# Altium PCB BOARD_34.PcbDoc
Units mm, origin at the board's own origin, x right, y up, seen from the top; angles counter-clockwise.
Board outline 34 x 34 mm, 4 copper layers (Top Layer 1, Top Layer, Bottom Layer, Bottom Layer 1), stack 1.57 mm thick; 60 components, 31 nets, 195 pads, 25 vias.
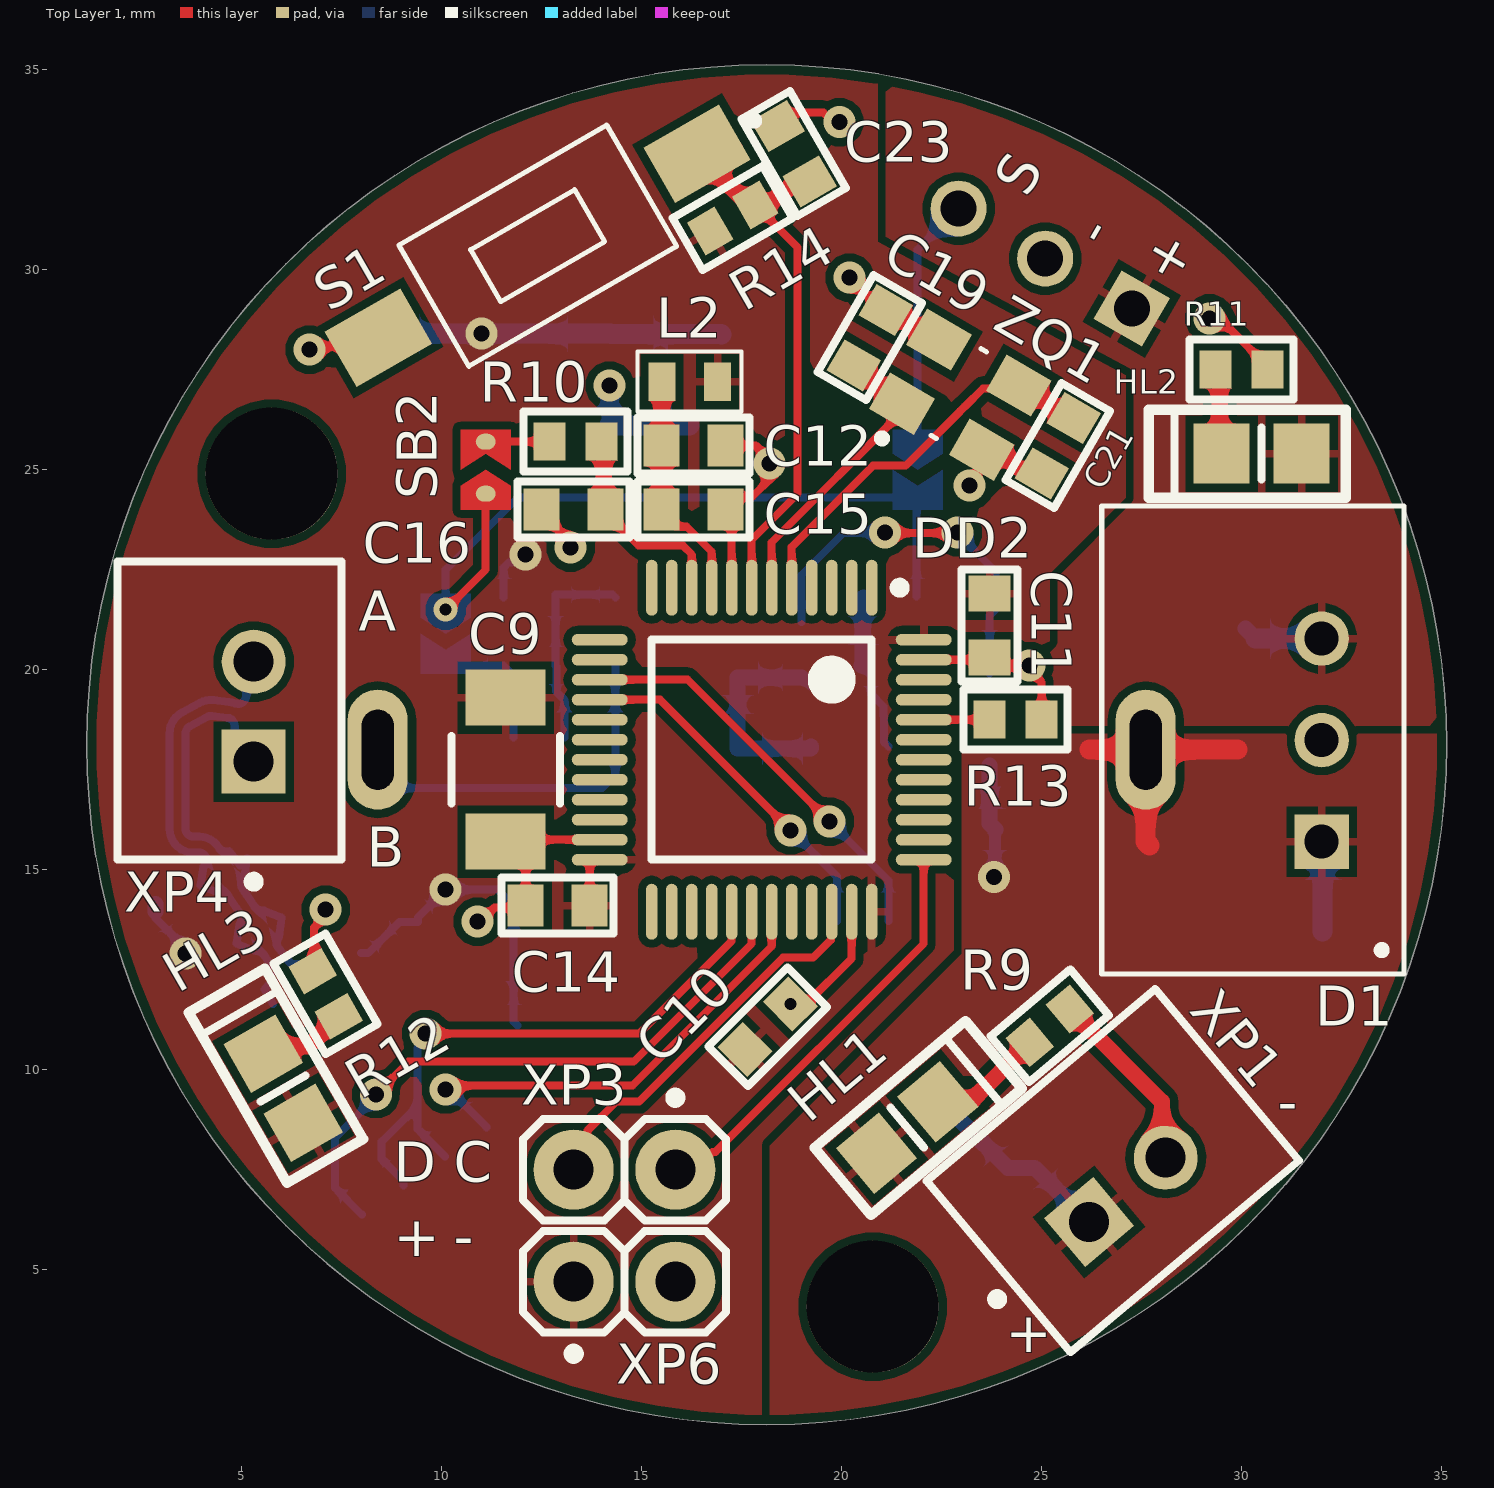
[diagram p0: Top Layer 1 view]
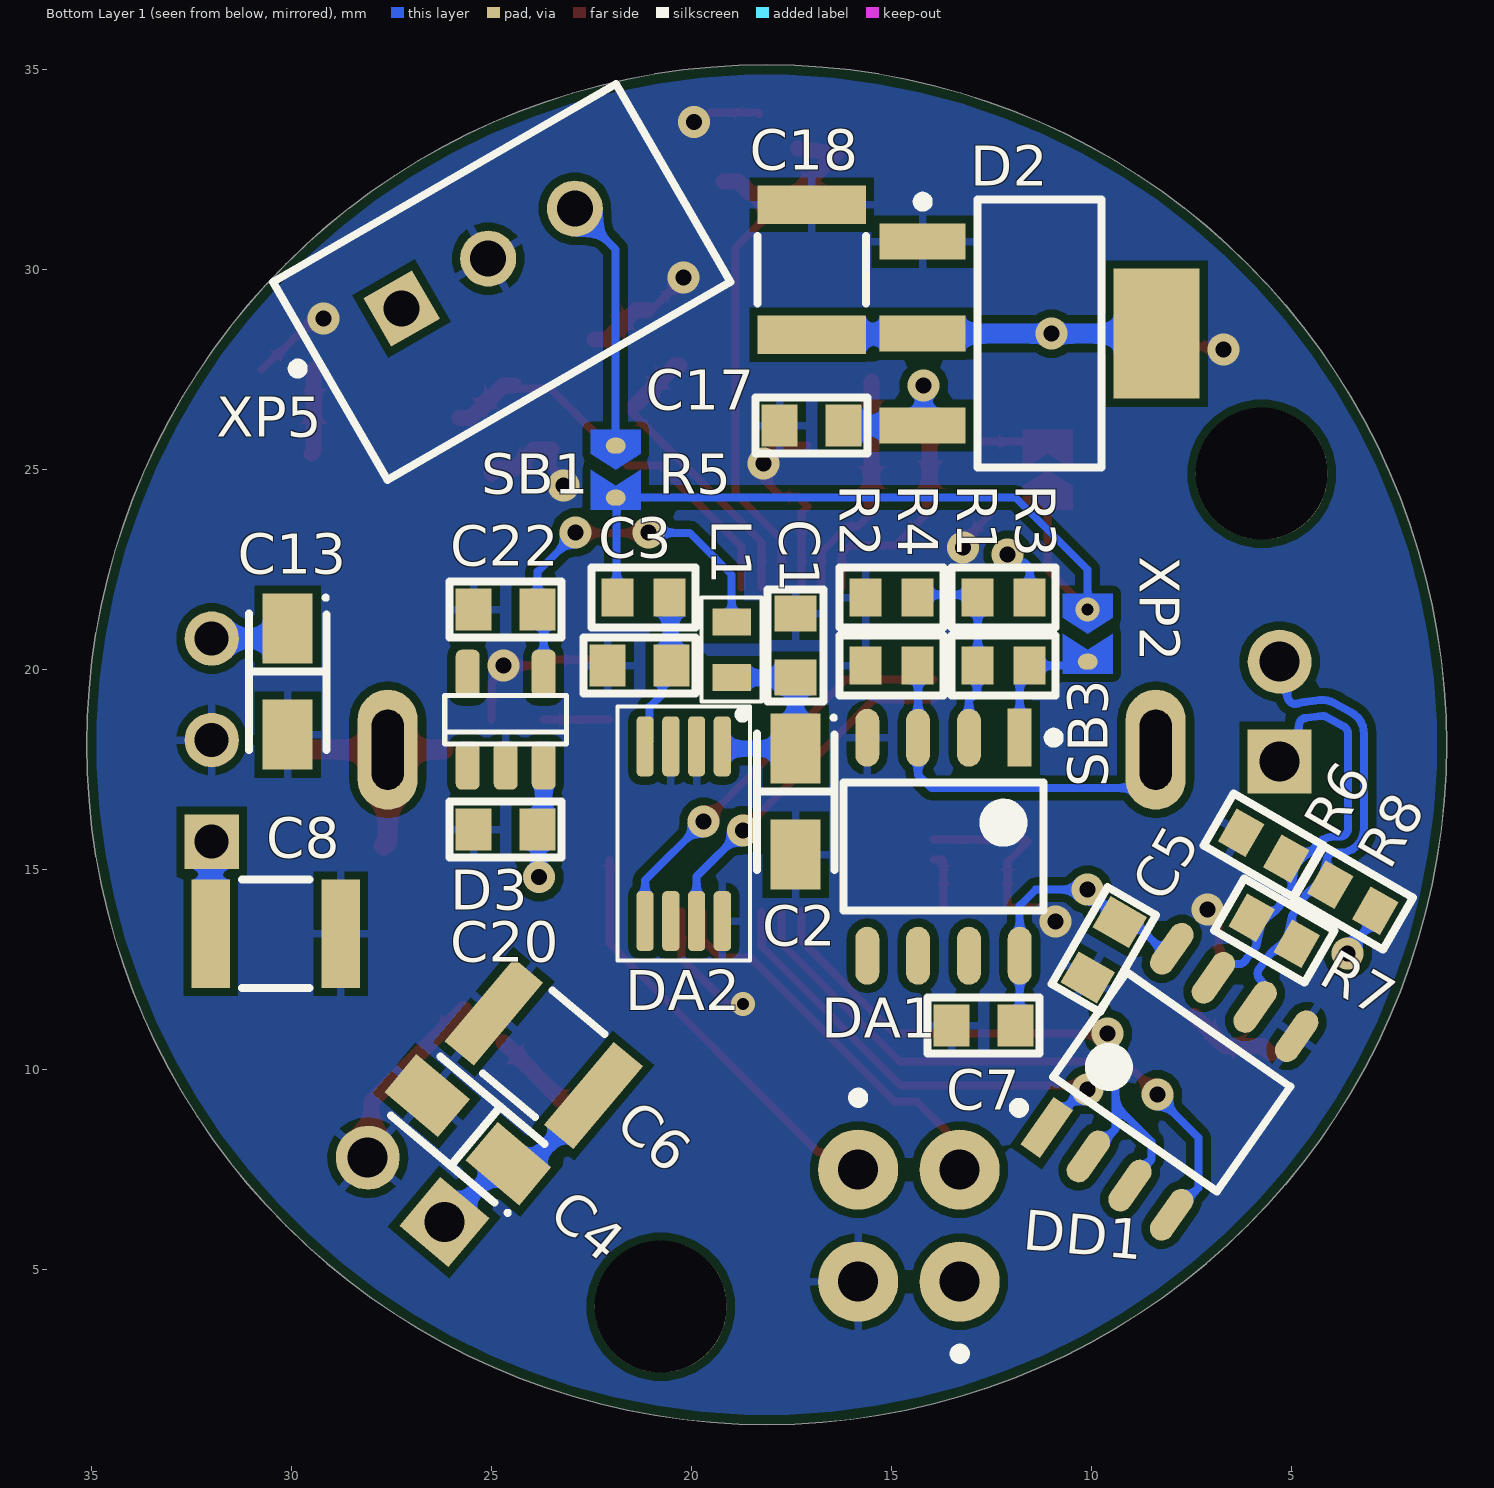
[diagram p1: Bottom Layer 1 view, seen from below]
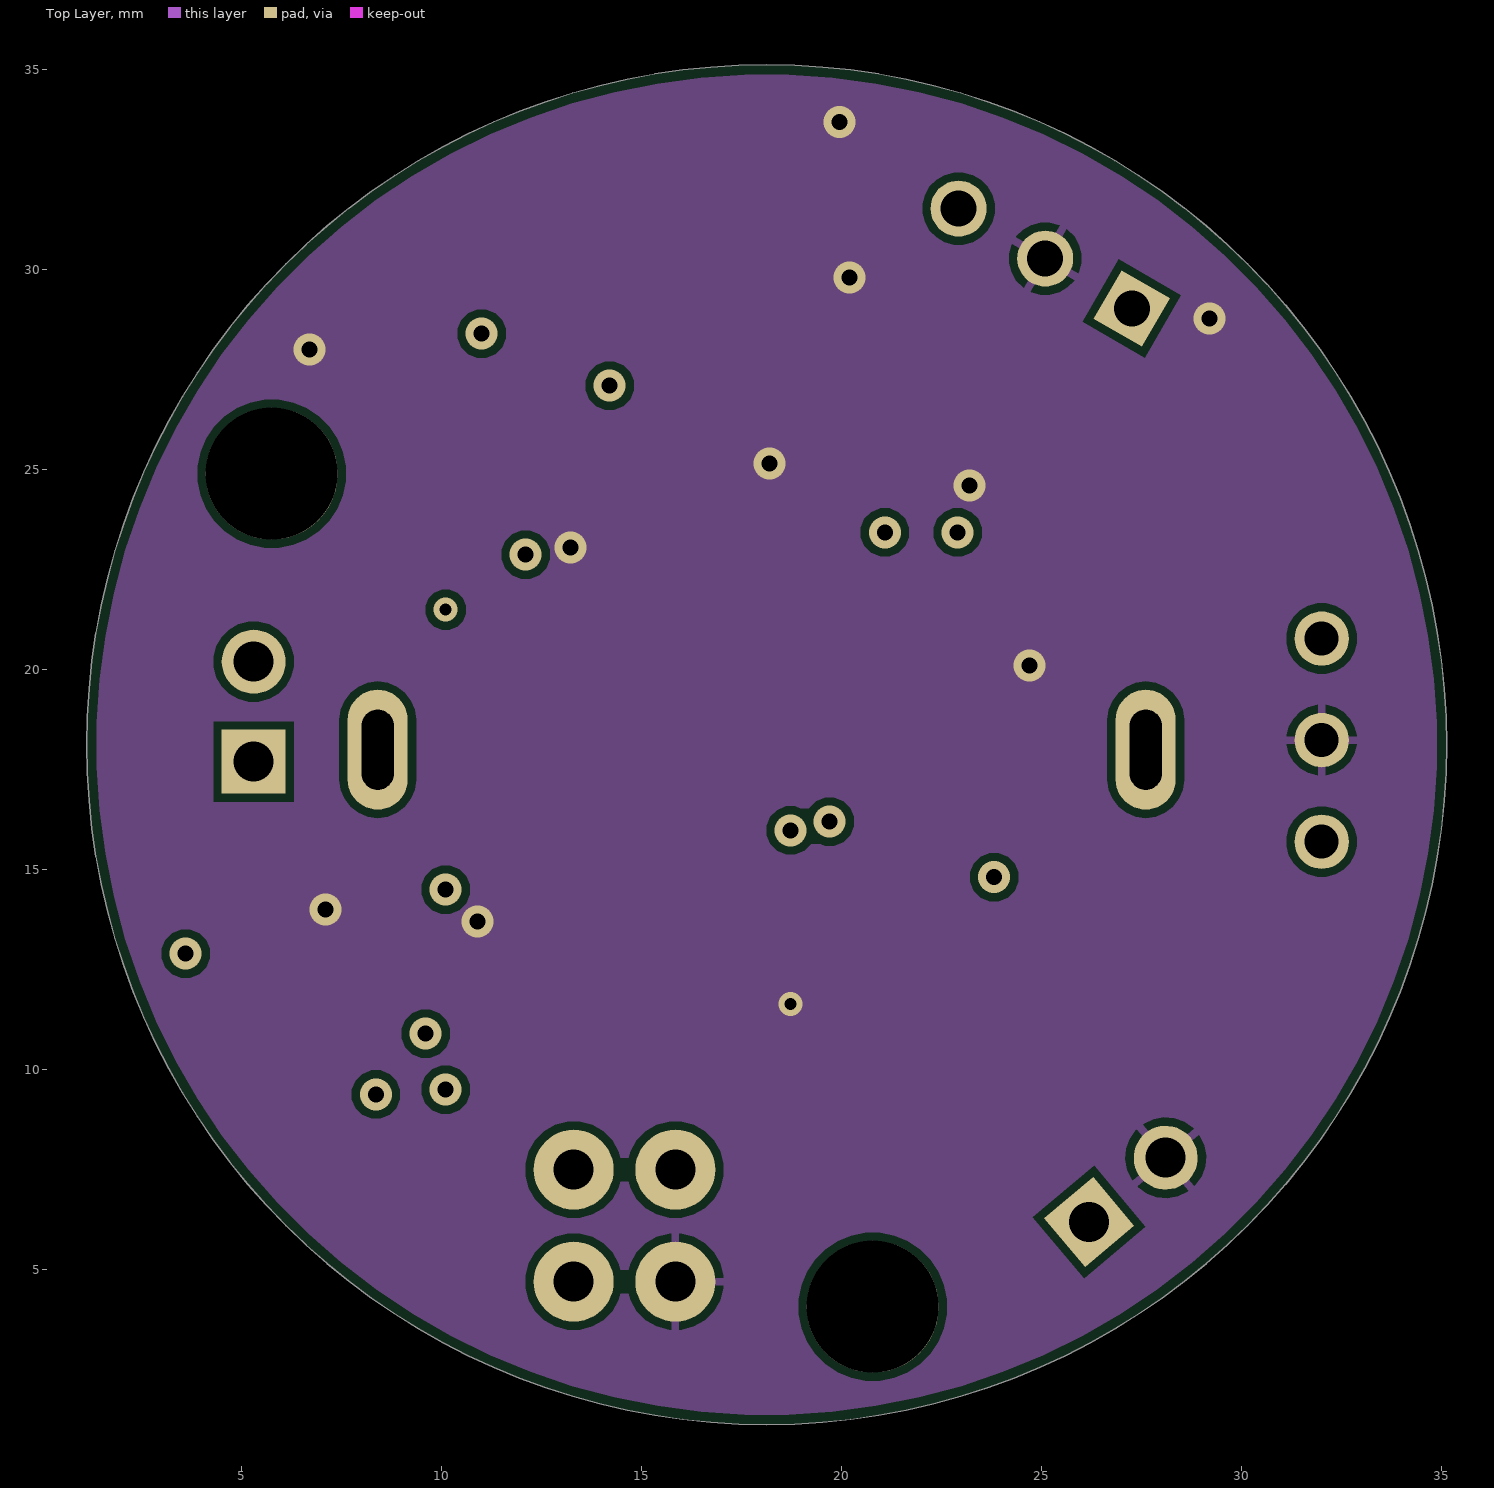
[diagram p2: Top Layer]
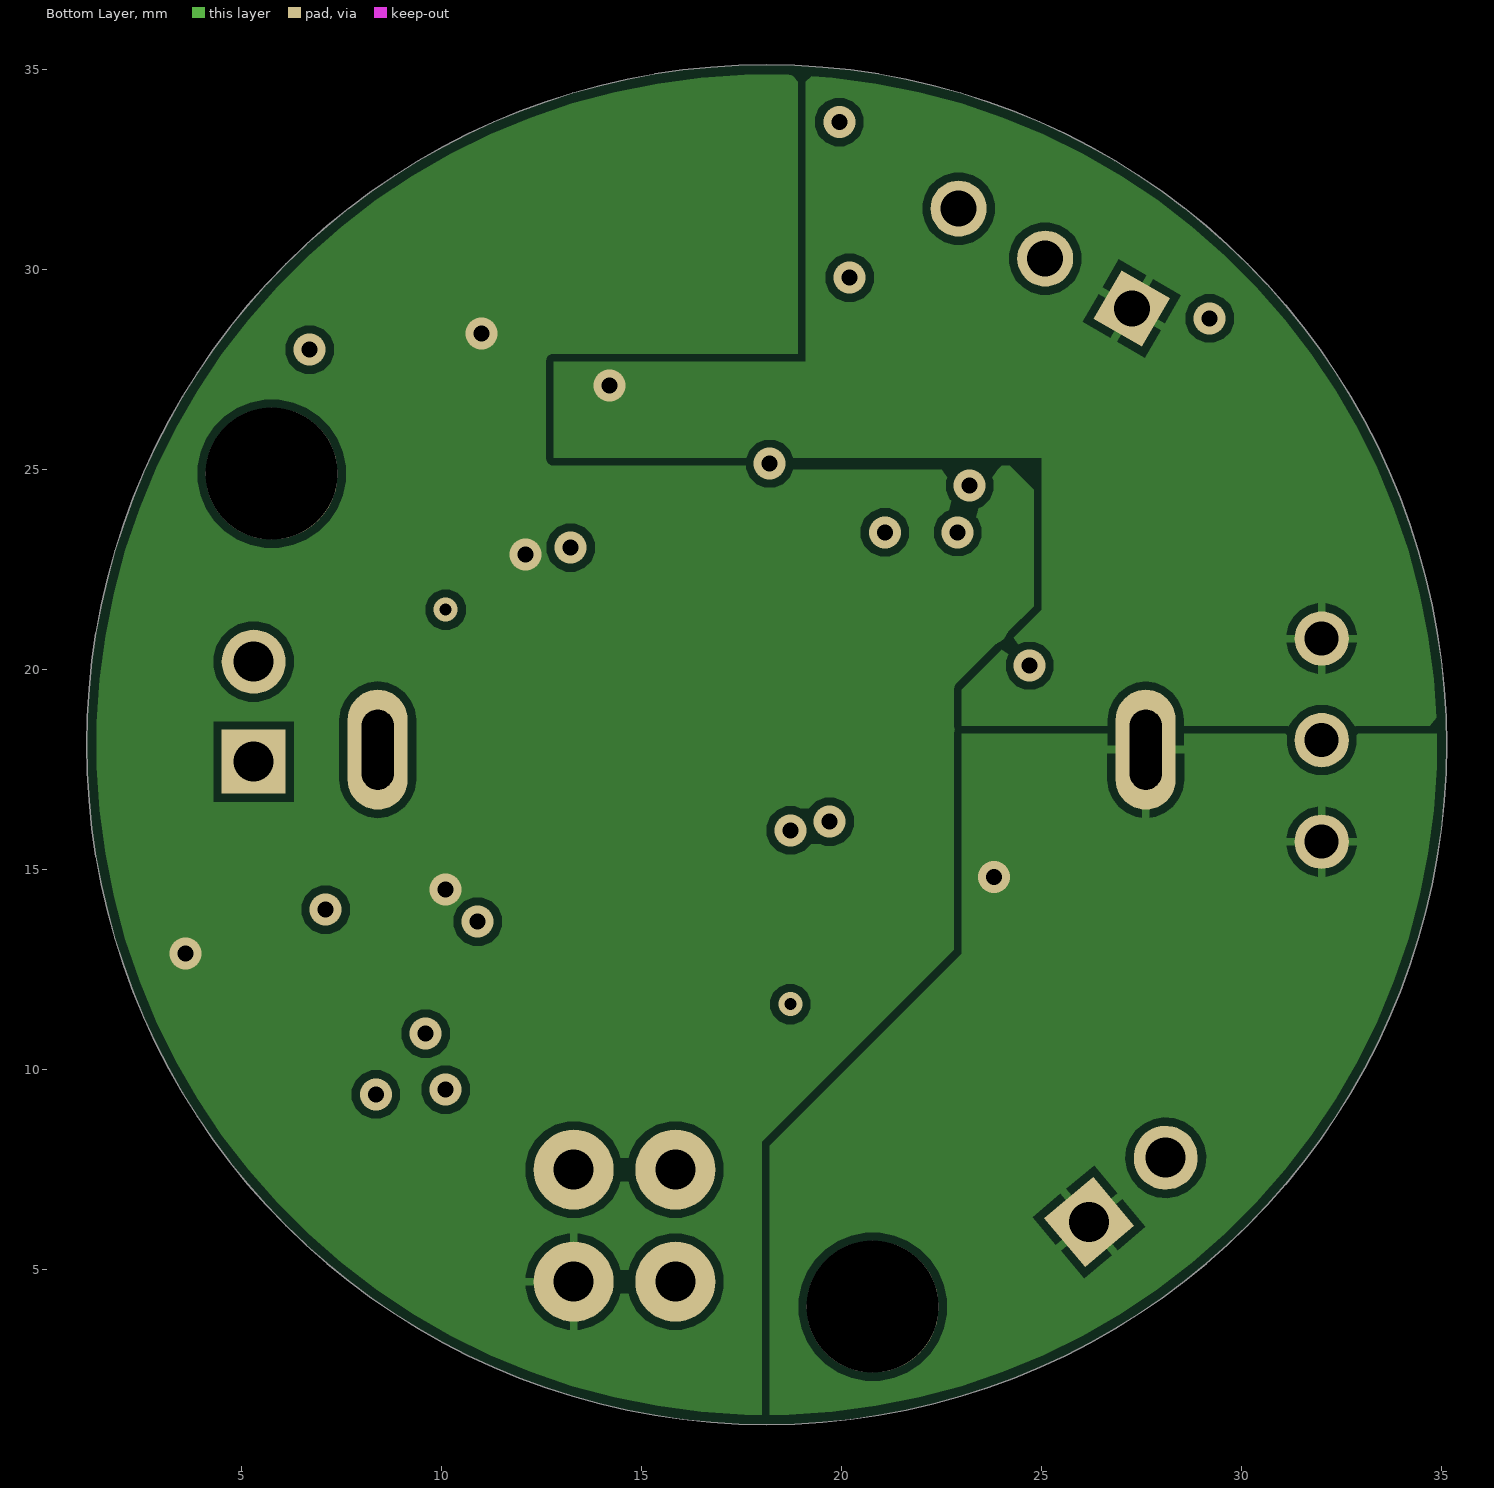
[diagram p3: Bottom Layer]

## Layer stack, top to bottom
Top Solder: solder mask 0.0102, Solder Resist, Dk 3.5
Top Layer 1: signal copper 0.035
Dielectric 2: prepreg 0.115, FR4 PR, Dk 4.2
Top Layer: signal copper 0.035
Dielectric 1: dielectric 1.2, FR-4, Dk 4.8
Bottom Layer: signal copper 0.035
Dielectric 3: prepreg 0.115, FR4 PR, Dk 4.2
Bottom Layer 1: signal copper 0.035
Bottom Solder: solder mask 0.0102, Solder Resist, Dk 3.5

## Board outline
18.125,1.125 cw(c18.125,18.125) 1.125,18.125 cw(c18.125,18.125) 18.125,35.125 cw(c18.125,18.125) 35.125,18.125 cw(c18.125,18.125)

## Design rules (kind name [scope] priority, off if disabled: settings)
BoardOutlineClearance "BoardOutlineClearance 1" [All] p1: gap=0.25 ignorepadtopadclearanceinfootprint=FALSE except(0: Arc-SplitContinuation Track-SplitContinuation SMDPad-SplitContinuation THPad-SplitContinuation Via-SplitContinuation Fill-SplitContinuation Poly-SplitContinuation Region-SplitContinuation Text-SplitContinuation) // Milling
BoardOutlineClearance "BoardOutlineClearance 2" [All] p2: gap=0.4 ignorepadtopadclearanceinfootprint=FALSE except(0: Arc-SplitContinuation Track-SplitContinuation SMDPad-SplitContinuation THPad-SplitContinuation Via-SplitContinuation Fill-SplitContinuation Poly-SplitContinuation Region-SplitContinuation Text-SplitContinuation) // V-Cut
Clearance [All] p1: gap=0.2 ignorepadtopadclearanceinfootprint=FALSE
DiffPairsRouting [All] p1: maxlimit=0.254 minlimit=0.2 mostfreqgap=0.2 toplayer_minwidth=0.2 toplayer_maxwidth=0.35 toplayer_prefwidth=0.3 midlayer1_minwidth=0.2 midlayer1_maxwidth=0.35 midlayer1_prefwidth=0.3 midlayer2_minwidth=0.2 midlayer2_maxwidth=0.35 midlayer2_prefwidth=0.3 bottomlayer_minwidth=0.2 bottomlayer_maxwidth=0.35 bottomlayer_prefwidth=0.3 maxuncoupledlength=10
HoleSize [All] p1: absolutevalues=TRUE maxlimit=2.54 minlimit=0.3 maxpercent=80.000 minpercent=20.000
HoleToHoleClearance [All] p1: gap=0.2 allowstackedmicrovias=TRUE
MinimumAnnularRing MinimumAnnularRing_via [IsVia] p1: minimumring=0.15
MinimumAnnularRing [All] p2: minimumring=0.2
MinimumSolderMaskSliver [All] p1: minsoldermaskwidth=0.2
PlaneClearance [All] p1: clearance=0.2
PlaneConnect [All] p1: planeconnectstyle=Relief reliefexpansion=0.5 reliefentries=4 reliefconductorwidth=0.2 reliefairgap=0.3
PolygonConnect [All] p1: thpad.connectstyle=Relief thpad.reliefconductorwidth=0.2 thpad.reliefentries=4 thpad.polygonreliefangle="90 Angle" thpad.airgapwidth=0.2 smdpad.connectstyle=Relief smdpad.reliefconductorwidth=0.2 smdpad.reliefentries=4 smdpad.polygonreliefangle="90 Angle" smdpad.airgapwidth=0.2 via.connectstyle=Direct via.reliefconductorwidth=0.2 via.reliefentries=4 via.polygonreliefangle="90 Angle" via.airgapwidth=0.2
RoutingCorners [All] p1: cornerstyle=45-Degree minsetback=2 maxsetback=2
RoutingVias [All] p1: holewidth=0.3 width=0.6 viastyle="Through Hole" minholewidth=0.3 minwidth=0.6 maxholewidth=0.5 maxwidth=0.8
SilkToSilkClearance [All] p1: silktosilkclearance=0.15
SilkToSolderMaskClearance [IsPad] p1: minsilkscreentomaskgap=0.2 clearancetoexposedcopper=TRUE
SolderMaskExpansion SolderMaskExpansion_1 [IsVia] p1: expansion=0.102 istentingtop=TRUE
SolderMaskExpansion [All] p2: expansion=0.15 istentingtop=FALSE
SupplyNets "Schematic Supply Nets_9" [InNet('5V')] p1: voltage=0.000
SupplyNets "Schematic Supply Nets_8" [InNet('3.3V')] p2: voltage=0.000
SupplyNets "Schematic Supply Nets_7" [InNet('5RV')] p3: voltage=0.000
SupplyNets "Schematic Supply Nets_6" [InNet('GND')] p4: voltage=0.000
SupplyNets "Schematic Supply Nets_5" [InNet('24V')] p5: voltage=0.000
SupplyNets "Schematic Supply Nets_4" [InNet('+3,3В_IN')] p6: voltage=0.000
SupplyNets "Schematic Supply Nets_3" [InNet('+5В_IN')] p7: voltage=0.000
SupplyNets "Schematic Supply Nets_2" [InNet('+5В')] p8: voltage=0.000
SupplyNets "Schematic Supply Nets_1" [InNet('GND')] p9: voltage=0.000
SupplyNets "Schematic Supply Nets" [InNet('+3,3В')] p10: voltage=0.000
Width [All] p1: maxlimit=0.5 minlimit=0.2 preferedwidth=0.2 minimp=50.000000 maximp=50.000000 favimp=50.000000
21 further rules are at their usual default settings.

## Classes and differential pairs
differential pair RS485: +RS485_P -RS485_N

## Components (designator, comment, footprint, x,y, rotation, side; value= is the part's Value field where it differs from the comment)
C1 "Capacitor" 0603C 17.4,20.6 r270 bottom value="0,1 мк"
C2 "Capacitor" TC_A 17.4,16.7 r270 bottom value="10 мк"
C3 "Capacitor" 0603C 21.3,20.1 r180 bottom value="0,1 мк"
C4 "Capacitor" TC_A 25.6,8.5 r40 bottom value="100 мк"
C5 "Capacitor" 0603C 9.7,13 r120 bottom value="0,1 мк"
C6 "Capacitor" 1210C 23.7,10.4 r220 bottom value="10 мк"
C7 "Capacitor" 0603C 12.7,11.1 r180 bottom value="0,1 мк"
C8 "Capacitor" 1210C 30.4,13.4 r0 bottom value="10 мк"
C9 "Capacitor" 1206C 11.6,17.5 r90 top value="4,7 мк"
C10 "Capacitor" 0603C 18.15,11.075 r225 top value="0,1 мк"
C11 "Capacitor" 0603C 23.7,21.1 r90 top value="0,1 мк"
C12 "Capacitor" 0603C 16.3,25.6 r180 top value="1 мк"
C13 "Capacitor" TC_A 30.1,19.7 r270 bottom value="22 мк"
C14 "Capacitor" 0603C 12.9,14.1 r0 top value="0,1 мк"
C15 "Capacitor" 0603C 16.3,24 r180 top value="10 н"
C16 "Capacitor" 0603C 13.3,24 r0 top value="0,1 мк"
C17 "Capacitor" 0603C 17,26.1 r180 bottom value="0,1 мк"
C18 "Capacitor" 1210C 17,30 r270 bottom value="10 мк"
C19 "Capacitor" 0603C 20.7,28.3 r60 top value="22 п"
C20 "Capacitor" 0603C 24.65,16 r0 bottom value="0,1 мк"
C21 "Capacitor" 0603C 25.4,25.6 r60 top value="22 п"
C22 "Capacitor" 0603C 24.65,21.5 r180 bottom value="0,1 мк"
C23 "Capacitor" 0603C 18.8,32.9 r120 top value="0,1 мк"
D1 "TSR 1-2450" SIP3 30.25,18.24 r90 top
D2 "LD1117S33CTR" SOT223 11.3,28.4 r180 bottom
D3 "ADR02BUJZ-REEL7" SOT23-5 24.65,18.75 r180 bottom
DA1 "AD8602ARZ-REEL7" SOIC-8 13.705,15.575 r270 bottom
DA2 "AD7680ARMZ" MSOP-8 20.2,15.9 r270 bottom
DD1 "MAX485CSA" SOIC-8 8,9.7 r125 bottom
DD2 "STM32F103C8T6" LQFP48 18,18 r270 top
HL1 "LED" 0805D 21.493,8.57 r40 top
HL2 "LED" 0805D 30.6,25.3 r180 top
HL3 "LED" 0805D 6,9.4 r120 top
L1 "Ferrite Bead" 0603L 19,20.5 r270 bottom
L2 "Ferrite Bead" 0603L 16.2,27.2 r180 top
R1 "Resistor" 0603R 12.2,21.8 r180 bottom value="20 к"
R2 "Resistor" 0603R 15,21.8 r180 bottom value="6,2 к"
R3 "Resistor" 0603R 12.2,20.1 r180 bottom value="5,1 к"
R4 "Resistor" 0603R 15,20.1 r0 bottom value=100
R5 "Resistor" 0603R 21.2,21.8 r180 bottom value="10 к"
R6 "Resistor" 0603R 5.7,15.6 r30 bottom value=680
R7 "Resistor" 0603R 5.437,13.475 r30 bottom value=120
R8 "Resistor" 0603R 3.475,14.3 r30 bottom value=680
R9 "Resistor" 0603R 25.2,11.1 r40 top value="1,0 к"
R10 "Resistor" 0603R 13.35,25.7 r0 top value="10 к"
R11 "Resistor" 0603R 30,27.5 r0 top value="1,0 к"
R12 "Resistor" 0603R 7.1,11.9 r120 top value="1,0 к"
R13 "Resistor" 0603R 24.35,18.75 r0 top value="10 к"
R14 "Resistor" 0603R 17.274,31.293 r30 top value="10 к"
S1 "Tact_button" Button_SMD_10mm 12.4,30.6 r210 top
SB1 "SB" 0805SB 22.525,26 r270 bottom
SB2 "SB" 0805SB 11.725,24 r90 top
SB3 "SB" 0805SB 10.725,21.9 r270 bottom
XP1 "CWF-2" CWF-2 28.084,7.819 r220 top
XP2 "WIKA" WIKA_PCB 18,18 r180 bottom
XP3 "PLS-2" PLS2 15.84,7.5 r270 top
XP4 "CWF-2" CWF-2 5.275,20.2 r270 top
XP5 "CWF-3" CWF-3 25.1,30.3 r330 bottom
XP6 "PLS-2" PLS2 13.3,4.7 r90 top
ZQ1 "XTAL_GND" QSMD3.2x2.5 21.508,26.65 r60 top value="8 МГц"

## Footprints (in the part's own frame and the unit in brackets; to place one, negate y for a bottom-side part, rotate by r counter-clockwise, add the part's x,y. Pads: shape width x height; smd on the part's side, far side on the other; paste and mask are expansions set on the pad)
0603C [mm] "Chip Resistor, 2-Leads, Body 1,40x0,80mm, IPC Medium Density"
  rect 0.9x1.05 smd: 1(-0.8,0) 2(0.8,0)
  silkscreen extent -1.4,-0.7 1.4,0.7, body extent -0.85,-0.45 0.85,0.45, height 0.9
0603L [mm] "Chip Inductor, 2-Leads, Body 1,55x0,85mm, IPC Medium Density"
  rect 0.67x0.97 smd: 1(-0.695,0) 2(0.695,0)
  silkscreen extent -1.3,-0.75 1.3,0.75, body extent -0.8,-0.45 0.8,0.45, height 0.45
0603R [mm] "Chip Resistor, 2-Leads, Body 1.60x0.85mm, IPC Medium Density"
  rect 0.8x0.95 smd: 1(-0.65,0) 2(0.65,0)
  silkscreen extent -1.3,-0.75 1.3,0.75, body extent -0.87,-0.47 0.88,0.48, height 0.9
0805D [mm]
  rect 1.4x1.5 smd: 1(-0.9,-0.1) 2(1.1,-0.1)
  silkscreen extent -2,-1.2 2.93,1, body extent -0.98,-0.8 1.17,0.6, height 0.7
0805SB [mm]
  oval 0.4x0.5 smd: 1(0.4,0.625) 2(1.7,0.625)
  Top Layer 1 region: 1,1.25 1.4,0.625 1,0 2,0 2,1.25
  Top Layer 1 region: 0,1.25 0,0 0.6,0 1,0.625 0.6,1.25
  body extent 0.4,0 1.7,1.25, height 0.3
1206C [mm]
  rect 1.4x2 smd paste+0 mask+0: 1(-1.8,0) 2(1.8,0)
  silkscreen extent -0.85,-1.35 0.85,1.35, body extent -1.6,-0.74 1.6,0.86, height 1.59
1210C [mm]
  rect 0.954x2.706 smd paste+0 mask+0: 1(-1.625,0) 2(1.625,0)
  silkscreen extent -0.85,-1.35 0.85,1.35, body extent -1.6,-1.25 1.6,1.25, height 2.7
Button_SMD_10mm [mm]
  rect 2.18x1.6 smd: 1(-4.6,0) 2(4.6,0)
  silkscreen extent -6.35,-1.75 3,1.75, body extent -3.4,-1.75 3.4,1.75, height 5.2
CWF-2 [mm]
  rect 1.6x1.6 hole 1 paste-2539.97 mask+0: 1(2.5,0.025)
  round 1.6 hole 1 paste-2539.97 mask+0: 2(0,0.025)
  silkscreen extent -2.51,-3.38 5.62,2.22, body extent -2.5,-3.53 5,2.23, height 7
CWF-3 [mm]
  rect 1.4x1.4 hole 0.9 paste-2539.97 mask+0: 1(2.5,0.025)
  round 1.4 hole 0.9 paste-2539.97 mask+0: 2(0,0.025) 3(-2.5,0.025)
  silkscreen extent -4.95,-2.16 5.62,3.56, body extent -5,-2.18 5,3.58, height 7
LQFP48 [mm] "TSQFP, 48-Leads, Body 7,00x7,00mm, Pitch 0,50mm, IPC Medium Density"
  oval 1.4x0.29 smd: 1(-4.05,2.75) 2(-4.05,2.25) 3(-4.05,1.75) 4(-4.05,1.25) 5(-4.05,0.75) 6(-4.05,0.25) 7(-4.05,-0.25) 8(-4.05,-0.75) 9(-4.05,-1.25) 10(-4.05,-1.75) 11(-4.05,-2.25) 12(-4.05,-2.75)
  oval 0.29x1.4 smd paste+0 mask+0.09: 13(-2.75,-4.05) 14(-2.25,-4.05) 15(-1.75,-4.05) 16(-1.25,-4.05) 17(-0.75,-4.05) 18(-0.25,-4.05) 19(0.25,-4.05) 20(0.75,-4.05) 21(1.25,-4.05) 22(1.75,-4.05) 23(2.25,-4.05) 24(2.75,-4.05) 37(2.75,4.05) 38(2.25,4.05) 39(1.75,4.05) 40(1.25,4.05) 41(0.75,4.05) 42(0.25,4.05) 43(-0.25,4.05) 44(-0.75,4.05) 45(-1.25,4.05) 46(-1.75,4.05) 47(-2.25,4.05) 48(-2.75,4.05)
  oval 1.4x0.29 smd paste+0 mask+0.09: 25(4.05,-2.75) 26(4.05,-2.25) 27(4.05,-1.75) 28(4.05,-1.25) 29(4.05,-0.75) 30(4.05,-0.25) 31(4.05,0.25) 32(4.05,0.75) 33(4.05,1.25) 34(4.05,1.75) 35(4.05,2.25) 36(4.05,2.75)
  silkscreen extent -4.17,-2.75 2.75,3.58, body extent -4.5,-4.47 4.5,4.52, height 1.48
MSOP-8 [mil]
  rrect50% 59x17 smd: 1(-86,38) 2(-86,12.67) 3(-86,-12.67) 4(-86,-38) 5(86,-38) 6(86,-12.67) 7(86,12.67) 8(86,38)
  silkscreen extent -125,-65 125,65, body extent -96,-59 96,59, height 43
PLS2 [mm]
  round 2 hole 1: 1(0,0) 2(0,-2.54)
  silkscreen extent -1.92,-3.81 1.27,1.27, body extent -1.27,-3.81 1.27,1.27, height 8.44
QSMD3.2x2.5 [mm] "Кварцевый резонатор"
  rect 1.05x1.3 smd: 1(0,0) 2(1.85,-2.3) 3(0,-2.3) 3(1.85,0)
  silkscreen extent -1.1,-1.18 2.18,0.1, body extent -0.32,-2.75 2.18,0.45, height 0.8
SIP3 [mm]
  rect 1.358x1.358 / inner round 1.358 / far side rect 1.358x1.358 hole 0.85: 1(-2.54,-1.75)
  round 1.358 hole 0.85: 2(0,-1.75) 3(2.54,-1.75)
  silkscreen extent -5.85,-3.81 5.85,3.75, body extent -5.85,-3.75 5.85,3.75, height 10.15
SOIC-8 [mm] "for operational amplifier"
  rect 1.45x0.6 smd: 1(-2.725,1.905)
  oval 1.45x0.6 smd: 2(-2.725,0.635) 3(-2.725,-0.635) 4(-2.725,-1.905) 5(2.725,-1.905) 6(2.725,-0.635) 7(2.725,0.635) 8(2.725,1.905)
  silkscreen extent -2.85,-2.5 1.6,2.88, body extent -3,-2.5 3,2.5, height 1.75
SOT23-5 [mm]
  rrect50% 0.6x1.2 smd: 1(-0.95,-1.15) 2(0,-1.15) 3(0.95,-1.15) 4(0.95,1.15) 5(-0.95,1.15)
  silkscreen extent -1.52,-0.61 1.52,0.61, body extent -1.5,-1.25 1.5,1.25, height 1.1
SOT223 [mm] "SOT223, ld1117"
  rect 2.15x0.9 smd: 1(-2.925,2.3) 2(-2.925,0) 3(-2.925,-2.3)
  rect 2.15x3.25 smd: 2(2.925,0)
  silkscreen extent -3.05,-3.35 1.55,3.42, body extent -3.56,-3.3 3.51,3.2, height 1.6
TC_A [mm] "Tantalum capacitor, type A,  1 pin - plus"
  rect 1.75x1.25 smd: 1(-1.325,0) 2(1.325,0)
  silkscreen extent -2.15,-0.97 1.7,1, body extent -1.73,-0.8 1.73,0.8, height 1.64
WIKA_PCB [mm]
  oval 1.5x3 hole 0.8 slot 2 at 90 deg: 1(-9.6,0) 2(9.6,0)
  body extent -9.96,-3.45 9.96,3.45, height 0.01

## Part data
C1 C3 C5 C7 C10 C11 C14 C16 C17 C20 C22 C23: library part Capacitor_0,1u_10_50V_X7R_0603C, "Конденсатор", Capacity (nF)=100, Dielectric=X7R, Tolerance=0,1, Voltage (V)=50, Library Path2=Schematic\Capacitor.SchLib, Part Number=Capacitor_0,1u_10_50V_X7R_0603C
C2: library part Capacitor_10u_10_50V_TC_A, "Танталовый конденсатор", Capacity (uF)=10, Tolerance=0,1, Voltage (V)=50, Part Number=Capacitor_10u_10_50V_TC_A, Type=Tantalum
C4: library part Capacitor_100u_10_50V_TC_A, "Танталовый конденсатор", Capacity (uF)=100, Tolerance=0,1, Voltage (V)=50, Part Number=Capacitor_100u_10_50V_TC_A, Type=Tantalum
C6 C8 C18: library part Capacitor_10u_10_35V_X7R_1210C, "Конденсатор", Capacity (nF)=10000, Dielectric=X7R, Tolerance=0,1, Voltage (V)=35, Library Path2=Schematic\Capacitor.SchLib, Part Number=Capacitor_10u_10_35V_X7R_1210C
C9: library part Capacitor_4,7u_10_50V_X7R_1206C, "Конденсатор", Capacity (nF)=4700, Dielectric=X7R, Tolerance=0,1, Voltage (V)=50, Library Path2=Schematic\Capacitor.SchLib, Part Number=Capacitor_4,7u_10_50V_X7R_1206C
C12: library part Capacitor_1u_10_50V_X7R_0603C, "Конденсатор", Capacity (nF)=1000, Dielectric=X7R, Tolerance=0,1, Voltage (V)=50, Library Path2=Schematic\Capacitor.SchLib, Part Number=Capacitor_1u_10_50V_X7R_0603C
C13: library part Capacitor_22u_10_50V_TC_A, "Танталовый конденсатор", Capacity (uF)=22, Tolerance=0,1, Voltage (V)=50, Part Number=Capacitor_22u_10_50V_TC_A, Type=Tantalum
C15: library part Capacitor_10n_10_50V_X7R_0603C, "Конденсатор", Capacity (nF)=10, Dielectric=X7R, Tolerance=0,1, Voltage (V)=50, Library Path2=Schematic\Capacitor.SchLib, Part Number=Capacitor_10n_10_50V_X7R_0603C
C19 C21: library part Capacitor_22p_5_50V_X7R_0603C, "Конденсатор", Capacity (nF)=0,022, Dielectric=X7R, Tolerance=0,05, Voltage (V)=50, Library Path2=Schematic\Capacitor.SchLib, Part Number=Capacitor_22p_5_50V_X7R_0603C
D1: "DC/DC преобразователь, 5Вт, вход 6.5-36В, выход 5В/ 1А", Part Number="TSR 1-2450"
D2: "Линейный стабилизатор напряжения", Part Number=LD1117S33CTR
D3: "Источник опорного напряжения, 5 В", Part Number=ADR02BUJZ-REEL7
DA1: "2-х канальный прецизионный, широкополосный операционный усилитель с однополярным питанием", Part Number=AD8602ARZ-REEL7
DA2: "16-бит АЦП, SAR, 100Квыборок/с", Part Number=AD7680ARMZ
DD1: "RS-485 приёмопередатчик", Part Number=MAX485CSA
DD2: "Микроконтроллер", Case=корпус, Manufacturer="ST Microelectronics", Value1=MCU, Datasheet=http://www.st.com/content/ccc/resource/technical/document/datasheet/33/d4/6f/1d/df/0b/4c/6d/CD00161566.pdf/files/CD00161566.pdf/jcr:content/translations/en.CD00161566.pdf, Notice="48 пиновая версия STM32F103", Part Number=STM32F103C8T6, Rate=-0,3...4,0В, Shop="магазин с самой дешевой ценой"
HL1: "Светодиод", Color=Red, Part Number=LED
HL2: "Светодиод", Color=Yellow, Part Number=LED
HL3: "Светодиод", Color=Green, Part Number=LED
L1 L2: library part Inductance, "BLM18AG121SZ1D Ferrite Beads Multi-Layer 120Ohm 25% 100MHz 0.8A 0.18Ohm DCR 0603 Automotive T/R Бусина ферритовая чип, габарит 0603, импеданс 120R, максимальный постоянный ток 800MA, активное сопротивление 0R18", Part Number=Inductance
R1: library part Resistor_20k_1_0603, "Резистор номиналом 20 кОм и точностью 1%", Tolerance=1%, Part Number=Resistor_20k_1_0603
R2: library part Resistor_6.2k_1_0603, "Резистор номиналом 6,2 кОм и точностью 1%", Tolerance=1%, Part Number=Resistor_6.2k_1_0603
R3: library part Resistor_5.1k_1_0603, "Резистор номиналом 5,1 кОм и точностью 1%", Tolerance=1%, Part Number=Resistor_5.1k_1_0603
R4: library part Resistor_100_1_0603, "Резистор номиналом 100 Ом и точностью 1%", Tolerance=1%, Part Number=Resistor_100_1_0603
R5 R10 R13 R14: library part Resistor_10k_1_0603, "Резистор номиналом 10 кОм и точностью 1%", Tolerance=1%, Part Number=Resistor_10k_1_0603
R6 R8: library part Resistor_680_1_0603, "Резистор номиналом 680 Ом и точностью 1%", Tolerance=1%, Part Number=Resistor_680_1_0603
R7: library part Resistor_120_1_0603, "Резистор номиналом 120 Ом и точностью 1%", Tolerance=1%, Part Number=Resistor_120_1_0603
R9 R11 R12: library part Resistor_1.0k_1_0603, "Резистор номиналом 1,0 кОм и точностью 1%", Tolerance=1%, Part Number=Resistor_1.0k_1_0603
S1: "Тактовая кнопка", Part Number=Tact_button
SB1 SB2 SB3: "Solder bridge, мост припоя, запаиваемая перемычка, net tie, jumper", Part Number=SB
XP1: library part XT30UPB-F, "30 А (15 продолжительно), прямая мать", Value1=+24V, Value2=GND, Part Number=XT30UPB-F, System=Connector
XP3: "Гребенка 2 пина", Value1=SWCLOCK, Value2=SWDIO, Part Number=PLS-2, System=Connector
XP4: "2-пиновый разъем с ключом", Value1=RS485_B, Value2=RS485_A, Datasheet=https://static.chipdip.ru/lib/413/DOC001413777.pdf, Part Number=CWF-2, System=Connector
XP5: "3-пиновый разъем с ключом", Value1=+5V, Value2=GND, Value3=SIG, Part Number=CWF-3, System=Connector
XP6: "Гребенка 2 пина", Value1=+3.3V, Value2=GND, Part Number=PLS-2, System=Connector
ZQ1: "Кварцевый резонатор с входом земли", Part Number=XTAL_GND
XP2: Part Number=WIKA

## Free pads (board coordinates)
  round 3.3 hole 3.3 unplated: 41(20.775,4.075) 42(5.75,24.9)

## Via types
v1: diameter 0.8, hole 0.4, Top Layer 1 to Bottom Layer 1, tented both sides, 23 vias
v2: diameter 0.6, hole 0.3, Top Layer 1 to Bottom Layer 1, tented both sides, 2 vias

## Nets (pads, with @x,y where several pads share a name; then routed paths per layer and width w, separated by ;. In a path a pad name is that pad's centre, name@x,y a point inside that pad or via, vN(x,y) a via of type N, cw(c..) or ccw(c..) an arc to the next point about the centre after c; other vN are vias at no path point)
0.5-4.5V: SB1.1 XP5.3 | length 6.4
  Bottom Layer 1 w0.2: SB1.1 21.9,30.506 XP5.3
3.3V: C5.2 C7.2 C9.2 C10.2 C11.2 C14.2 C18.2 D2.2 DA1.8 DD1.8 DD2.24 DD2.36 DD2.48 HL3.1 L2.1 R1.2 R8.1 R14.1 XP6.1 | length 21
  Top Layer 1 w0.2: C14.2 13.7,15.208 13.742,15.25 DD2.24
  Bottom Layer 1 w0.2: R8.1@2.845,14.147 2.845,13.789 3.6,13.034 v1(3.6,12.9) ; DD1.8@7.987,12.912 8.162,12.912 8.942,13.693 C5.2 9.41,13.693 9.41,13.81 v1(10.1,14.5) 11.4,14.5 11.8,14.1 DA1.8 11.8,11.2 C7.2 ; R1.2 11.55,22.558 11.677,22.685 11.748,22.685 11.938,22.875 v1(12.1,22.875)
  Bottom Layer 1 w0.4: R8.1@2.845,13.95 R8.1@2.845,14.147
  Bottom Layer 1 w0.5: D2.2@8.375,28.4 v1(11,28.4) 14.225,28.4 14.238,28.387 16.987,28.387 C18.2
4-20uA: DA1.3 R4.1 XP2.2 | length 9.4
  Bottom Layer 1 w0.2: XP2.2 8.4,17.641 9.001,17.041 14.007,17.041 14.34,17.374 R4.1@14.34,20.09
5RV: C22.2 D3.4 L1.1 | length 9.5
  Top Layer 1 w0.2: v1(21.077,23.434) 21.094,23.417 22.883,23.417 v1@22.9,23.4
  Bottom Layer 1 w0.2: L1.1 19,22.372 20.051,23.423 21.067,23.423 v1(21.077,23.434) ; v1@22.9,23.4 23.85,22.45 C22.2 23.7,21.35 D3.4
  other v1: 22.9,23.434
5V: C13.1 C17.2 D1.3 D2.3 HL2.1 XP5.1 | length 5
  Bottom Layer 1 w0.4: D2.3@14.2,26.125 v1(14.2,27.1) ; C13.1 C13.1@30.345,20.78
  Bottom Layer 1 w0.5: D2.3@14.2,26.125 D2.3 C17.2 ; C13.1@30.345,20.78 D1.3
24V: C4.1 C6.2 C8.2 C20.1 D1.1 D3.3 HL1.1 XP1.1 XP2.1 | length 16.3
  Top Layer 1 w0.5: 26.2,18 XP2.1 ; 27.7,15.6 27.6,15.7 XP2.1 ; 29.9,18 XP2.1
  Bottom Layer 1 w0.3: v1@23.831,14.831 C20.1@23.831,15.981
  Bottom Layer 1 w0.4: C6.2@22.555,9.255 22.555,9.147 24.154,7.548 24.685,7.548 24.821,7.548 26.176,6.193 XP1.1 ; D3.3 23.7,16.15 C20.1 C20.1@23.831,15.981 ; v1(23.812,14.813) v1@23.831,14.831 ; C8.2@32,13.425 C8.2@32.025,13.45 ; D1.1 D1.1@32.025,15.675
  Bottom Layer 1 w0.5: C8.2@32.025,13.45 D1.1@32.025,15.675
ADC1_IN: R5.1 SB1.2 SB2.1 SB3.1 | length 19.3
  Top Layer 1 w0.2: v2(10.1,21.5) 11.1,22.5 SB2.1
  Bottom Layer 1 w0.2: v2(10.1,21.5) 10.1,22.5 11.9,24.3 SB1.2 ; R5.1@21.875,21.825 SB1.2@21.875,24.275
BOOT0: DD2.44 R13.1 | length 1.7
  Top Layer 1 w0.2: DD2.44 R13.1
GND: C1.1 C2.2 C3.1 C4.2 C5.1 C6.1 C7.1 C8.1 C9.1 C10.1 C11.1 C12.1 C13.2 C14.1 C15.1 C16.1 C17.1 C18.1 C19.2 C20.2 C21.1 C22.1 C23.2 D1.2 D2.1 D3.2 DA1.4 DA2.2 DA2.3 DA2.8 DD1.5 DD2.8 DD2.23 DD2.35 DD2.47 R2.1 R4.2 R6.2 R9.2 R11.2 R12.2 R13.2 S1.2 XP1.2 XP5.2 XP6.2 ZQ1.3 | length 37.4
  Top Layer 1 w0.2: v1(6.7,28) 6.777,28.077 8.194,28.077 S1.2 ; R12.2 6.812,12.5 6.812,13.55 7.1,13.838 v1(7.1,14) ; v1(10.9,13.7) 10.967,13.7 11.317,14.05 12.1,14.05 C14.1 12.1,15.2 C9.1 11.65,15.75 DD2.23 ; C16.1 12.5,23.925 13.224,23.201 v1(13.224,23.053) ; C12.1 17.85,25.6 18.2,25.25 v1(18.2,25.15) 18.2,24.759 17.766,24.325 17.35,24.325 17.1,24.075 17.25,23.925 DD2.8 ; C23.2@18.3,33.893 18.338,33.93 19.539,33.93 19.778,33.691 v1(19.94,33.691) ; C10.1@18.984,11.549 18.807,11.549 v2(18.716,11.641) 19.107,11.641 20.25,12.783 DD2.35 ; v1(20.2,29.8) 21.007,28.993 C19.2 ; DD2.47 23.65,20.25 C11.1 23.9,20.1 v1(24.7,20.1) 24.7,19.983 25,19.683 R13.2 ; v1(23.2,24.6) 23.315,24.715 23.315,24.877 23.5,25.062 ZQ1.3@23.5,25.5 ; v1(29.2,28.781) 29.315,28.666 29.559,28.666 30.425,27.8 30.45,27.8 R11.2@30.75,27.5
  Top Layer 1 w0.4: C19.2 21.387,28.993 22.128,28.252 ZQ1.3@22.433,28.252 ; ZQ1.3@23.5,25.5 23.954,25.5 24.427,25.027 24.881,25.027 C21.1 ; R9.2 25.698,11.509 28.006,9.2 28.006,7.894 XP1.2
NetC1_2: C1.2 C2.1 DA2.1 L1.2 | length 5.6
  Bottom Layer 1 w0.2: L1.2 L1.2@19.235,19.57
  Bottom Layer 1 w0.4: L1.2 18.998,19.803 17.403,19.803 C1.2 C2.1 19.219,18.025 19.235,18.041 DA2.1
NetC3_2: C3.2 DA2.4 R5.2 | length 4
  Bottom Layer 1 w0.2: C3.2 20.733,19.867 20.733,19.392 21.05,19.075 21.05,18.851 21.054,18.847 21.054,18.195 DA2.4
  Bottom Layer 1 w0.4: C3.2 20.525,20.125 20.525,21.775 R5.2
NetC12_2: C12.2 C15.2 DD2.9 L2.2 | length 5.8
  Top Layer 1 w0.2: C15.2 15.5,23.925 15.85,23.575 16.126,23.575 16.75,22.951 DD2.9
  Top Layer 1 w0.4: C15.2 C12.2 15.503,25.603 15.503,27.198 L2.2
NetC16_2: C16.2 DD2.10 R10.2 | length 5.2
  Top Layer 1 w0.2: C16.2@14.05,24.05 14.05,23.975 14.925,23.1 16.035,23.1 16.25,22.885 DD2.10
  Top Layer 1 w0.4: R10.2 14.05,25.65 C16.2@14.05,24.05
NetDA1_2: DA1.2 R1.1 R2.2 R3.1 | length 5.2
  Bottom Layer 1 w0.2: DA1.2 13.07,19.241 12.868,19.442 12.868,20.082 R3.1 12.85,21.875 14.275,21.875 R2.2
NetHL1_2: HL1.2 R9.1 | length 2.9
  Top Layer 1 w0.4: HL1.2 22.412,9.188 23.208,9.188 R9.1
NetHL2_2: HL2.2 R11.1 | length 2.1
  Top Layer 1 w0.4: R11.1@29.45,27.5 29.45,25.45 HL2.2
NetHL3_2: HL3.2 R12.1 | length 2.3
  Top Layer 1 w0.4: HL3.2 5.724,10.59 6.678,10.59 R12.1
OSCin: C21.2 DD2.5 ZQ1.2 | length 10.1
  Top Layer 1 w0.2: DD2.5 18.75,23.068 20.782,25.1 21.6,25.1 22.954,26.454 22.96,26.464 23.075,26.58 23.08,26.58 23.526,27.026 24.349,27.026 ZQ1.2
  Top Layer 1 w0.4: ZQ1.2 24.717,27.102 25.526,26.293 C21.2
OSCout: C19.1 DD2.6 ZQ1.1 | length 7.4
  Top Layer 1 w0.2: DD2.6 18.25,23.185 21.508,26.443 ZQ1.1
  Top Layer 1 w0.4: C19.1 20.416,27.607 ZQ1.1@21.374,26.65
RESET: C23.1 DD2.7 R14.2 S1.1 | length 14.9
  Top Layer 1 w0.2: DD2.7 17.75,23.251 18.9,24.401 18.9,30.555 R14.2
  Top Layer 1 w0.4: S1.1@17.338,33.028 S1.1 R14.2@17.707,31.576 ; R14.2 18.167,31.618 18.449,31.9 18.533,31.9 18.84,32.207 C23.1
RS485_N: DD1.7 R6.1 R7.2 XP4.1 | length 11
  Bottom Layer 1 w0.2: 4.439,15.535 ccw(c4.612,15.636) 4.665,15.443 4.69,15.45 R6.1@4.962,15.111 ; 4.439,15.535 ccw(c4.093,15.335) 4.438,15.537 ccw(c3.92,15.235) 3.832,15.828 3.824,15.827 cw(c3.794,16.025) 3.594,16.025 3.594,18.406 cw(c3.794,18.406) 3.699,18.582 4.132,18.817 cw(c4.227,18.641) 4.248,18.84 4.642,18.799 cw(c4.621,18.6) 4.692,18.787 ; 4.693,18.787 cw(c4.621,18.6) 4.821,18.6 4.821,18.4 4.926,18.4 XP4.1 ; 5.014,14.541 cw(c5.188,14.64) 5.046,14.781 5.065,14.8 5.108,15.14 R6.1 ; 5.015,14.54 ccw(c5.188,14.64) 5.021,14.53 5.303,14.105 cw(c4.803,13.773) 5.322,14.074 cw(c4.976,13.873) 5.323,14.073 ; 5.323,14.072 ccw(c5.496,14.173) 5.503,13.973 5.553,13.975 R7.2 5.928,13.325 5.901,13.283 ccw(c6.071,13.177) 5.898,13.077 ; 5.898,13.077 ccw(c6.071,13.177) 5.912,13.056 6.132,12.765 cw(c5.654,12.403) 6.156,12.732 cw(c5.822,12.512) 6.157,12.73 ccw(c6.325,12.839) 6.329,12.639 6.675,12.645 DD1.7@6.887,12.277
RS485_P: DD1.6 R7.1 R8.2 XP4.2 | length 12
  Bottom Layer 1 w0.2: 3.94,19.169 3.508,18.933 ccw(c3.794,18.406) 3.194,18.406 3.194,16.025 ccw(c3.794,16.025) 3.882,15.431 3.89,15.432 cw(c3.92,15.235) 4.092,15.336 ; 3.941,19.169 cw(c4.227,18.641) 4.289,19.238 4.684,19.197 cw(c4.621,18.6) 4.834,19.161 cw(c4.693,18.787) 4.836,19.16 ccw(c4.908,19.347) 5.103,19.304 XP4.2 XP4.2@5.3,20.197 ; 4.093,15.335 cw(c3.92,15.235) 4.061,15.094 4.043,15.075 3.97,14.6 4.418,14.425 4.442,14.432 cw(c4.496,14.239) 4.669,14.34 ccw(c5.188,14.64) 4.688,14.309 4.97,13.884 cw(c4.803,13.773) 4.976,13.874 cw(c4.803,13.773) 4.973,13.667 4.946,13.625 R7.1 5.321,12.975 5.371,12.977 cw(c5.378,12.777) 5.551,12.877 5.552,12.876 ccw(c5.898,13.077) 5.554,12.873 ccw(c6.071,13.177) 5.593,12.814 5.813,12.524 cw(c5.654,12.403) 5.822,12.512 ; DD1.6@5.788,11.642 5.575,12.01 5.804,12.27 ccw(c5.654,12.403) 5.822,12.511
SPI1_MISO: DA2.7 DD2.16 | length 8.9
  Top Layer 1 w0.2: DD2.16 15.457,19.25 v1(18.724,15.983)
  Bottom Layer 1 w0.2: v1(18.724,15.983) 19.878,14.829 DA2.7
SPI1_SCK: DA2.5 DD2.15 | length 10.3
  Top Layer 1 w0.2: DD2.15 16.15,19.75 v1(19.7,16.2)
  Bottom Layer 1 w0.2: v1(19.7,16.2) 21.165,14.735 DA2.5
STM_ADC: R10.1 SB2.2 | length 1.6
  Top Layer 1 w0.2: SB2.2 R10.1
SWCLOCK: DD2.37 XP3.1 | length 10.7
  Top Layer 1 w0.2: XP3.1@15.749,7.649 16.476,7.649 16.766,7.939 16.839,7.939 22.05,13.15 DD2.37
SWDIO: DD2.34 XP3.2 | length 9.9
  Top Layer 1 w0.2: XP3.2 13.644,7.844 13.644,8.479 14.366,9.2 14.931,9.2 18.531,12.8 19.284,12.8 19.733,13.248 19.733,13.933 DD2.34
USART1_DE: DD1.2 DD1.3 DD2.29 | length 15.4
  Top Layer 1 w0.2: v1(9.6,10.9) 14.934,10.9 17.25,13.216 DD2.29
  Bottom Layer 1 w0.2: DD1.3 9.043,7.226 8.5,7.769 8.5,8.2 9.4,9.1 ; v1(9.6,10.9) 9.6,10.738 9.4,10.538 9.4,9.1 ; DD1.2 9.4,8.515 9.4,9.1
USART1_RX: DD1.1 DD2.31 | length 11.9
  Top Layer 1 w0.2: v1(10.1,9.5) 10.2,9.6 14.766,9.6 18.25,13.084 DD2.31
  Bottom Layer 1 w0.2: v1(10.1,9.5) 10.194,9.5 11.123,8.571 DD1.1
USART1_TX: DD1.4 DD2.30 | length 15.5
  Top Layer 1 w0.2: v1(8.355,9.381) 9.173,10.2 14.8,10.2 17.75,13.15 DD2.30
  Bottom Layer 1 w0.2: DD1.4 7.329,7.049 7.329,8.3 8.355,9.326 v1(8.355,9.381)
WIKA: DA1.1 R3.2 SB3.2 | length 3.4
  Bottom Layer 1 w0.2: SB3.2 10.204,20.2 10.304,20.1 R3.2 11.8,19.85 DA1.1
pads on no net: D3.1 D3.5 DA1.5 DA1.6 DA1.7 DA2.6 DD2.1 DD2.2 DD2.3 DD2.4 DD2.11 DD2.12 DD2.13 DD2.14 DD2.17 DD2.18 DD2.19 DD2.20 DD2.21 DD2.22 DD2.25 DD2.26 DD2.27 DD2.28 DD2.32 DD2.33 DD2.38 DD2.39 DD2.40 DD2.41 DD2.42 DD2.43 DD2.45 DD2.46

## Polygon pours and split planes (outlines as drawn)
24V on Top Layer 1 "24V_L01_P002" (solid, remove dead copper, pour order 2): 18.2,0.7 18.2,8.1 23,12.9 23,18.4 35.2,18.4 35.2,1.7 34.7,1.2
3.3V on Top Layer 1 "3.3V_L01_P003" (solid, remove dead copper, pour order 3): 19.758,35.4 20.9,35.4 20.9,30.7 23.3,29.4 27.1,27.358 27.1,26.3 27.1,24.3 25.2,22.4 25.2,14.958 18.4,8.158 18.4,0.258 0,0.258 0,30.658 5.4,36.058 19.1,36.058
5V on Top Layer 1 "5V_L01_P004" (solid, remove dead copper, pour order 4): 19.1,31.4 19.1,30.6 19.1,27.7 20.55,25.95 25,24.6 25,21.5 23,19.5 23,18.2 36.1,18.2 35.2,34 32.9,36.3 19.1,36.3 19.1,32.427
24V on Bottom Layer "24V_L03_P011" (solid, remove dead copper, pour order 11): 18.2,0.7 18.2,8.1 23,12.9 23,18.4 35.2,18.4 35.2,1.7 34.7,1.2
3.3V on Bottom Layer "3.3V_L03_P013" (solid, remove dead copper, pour order 13): 18,0 18,8.2 25.2,15.4 25.2,24.1 24.1,25.2 23.9,25 17.6,25 17.6,27 17.43,27.17 19.07,27.17 19.2,27.3 19.2,35.7 19.1,35.8 5.4,35.8 0,30.4 0,0
5V on Bottom Layer "5V_L03_P012" (solid, remove dead copper, pour order 12): 19.1,31.4 19.1,30.6 19.1,27.7 12.8,27.7 12.8,25.3 25,25.3 25,21.5 23,19.5 23,18.2 36.1,18.2 35.2,34 32.9,36.3 19.1,36.3 19.1,32.427
GND on Bottom Layer 1 "GND_L04_P000" (solid, remove dead copper, pour order 0): 18.125,1.125 cw(c18.125,18.125) 1.125,18.125 cw(c18.125,18.125) 18.125,35.125 cw(c18.125,18.125) 35.125,18.125 cw(c18.125,18.125)
GND on Top Layer "GND_L02_P001" (solid, remove dead copper, pour order 1): 18.125,1.125 cw(c18.125,18.125) 1.125,18.125 cw(c18.125,18.125) 18.125,35.125 cw(c18.125,18.125) 35.125,18.125 cw(c18.125,18.125)

## Silkscreen, mask and mechanical layers (free items; w line width, h text height)
Top Overlay:
  text "S" at 24.627,31.773 h1 r60
  text "-" at 26.56,30.523 h1 r60
  text "+" at 28.271,29.59 h1 r60
  text "A" at 7.925,20.975 h1
  text "B" at 8.125,15.075 h1
  text "-" at 30.9,8.7 h1
  text "D" at 8.8,7.2 h1
  text "C" at 10.3,7.2 h1
  text "+" at 8.8,5.333 h1
  text "-" at 10.3,5.333 h1
  text "+" at 24.1,2.933 h1
Mechanical 2:
  circle w0.25: c18.125,18.125 r17